# EAGLE board NavCom_Board_3 (EAGLE 7.2.0)
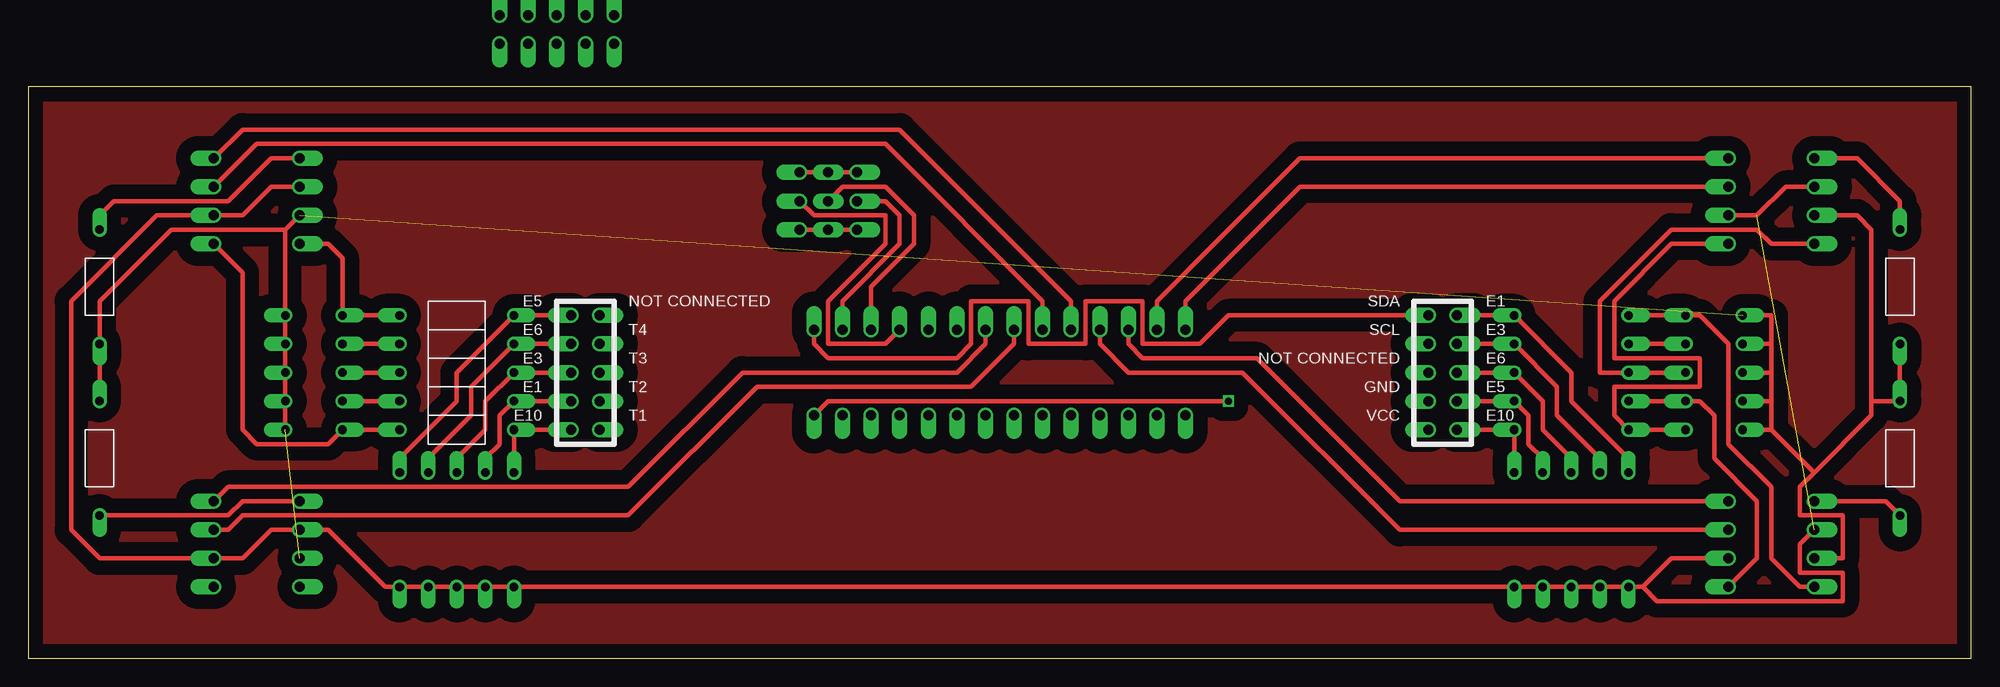
[diagram p0: board, top side]
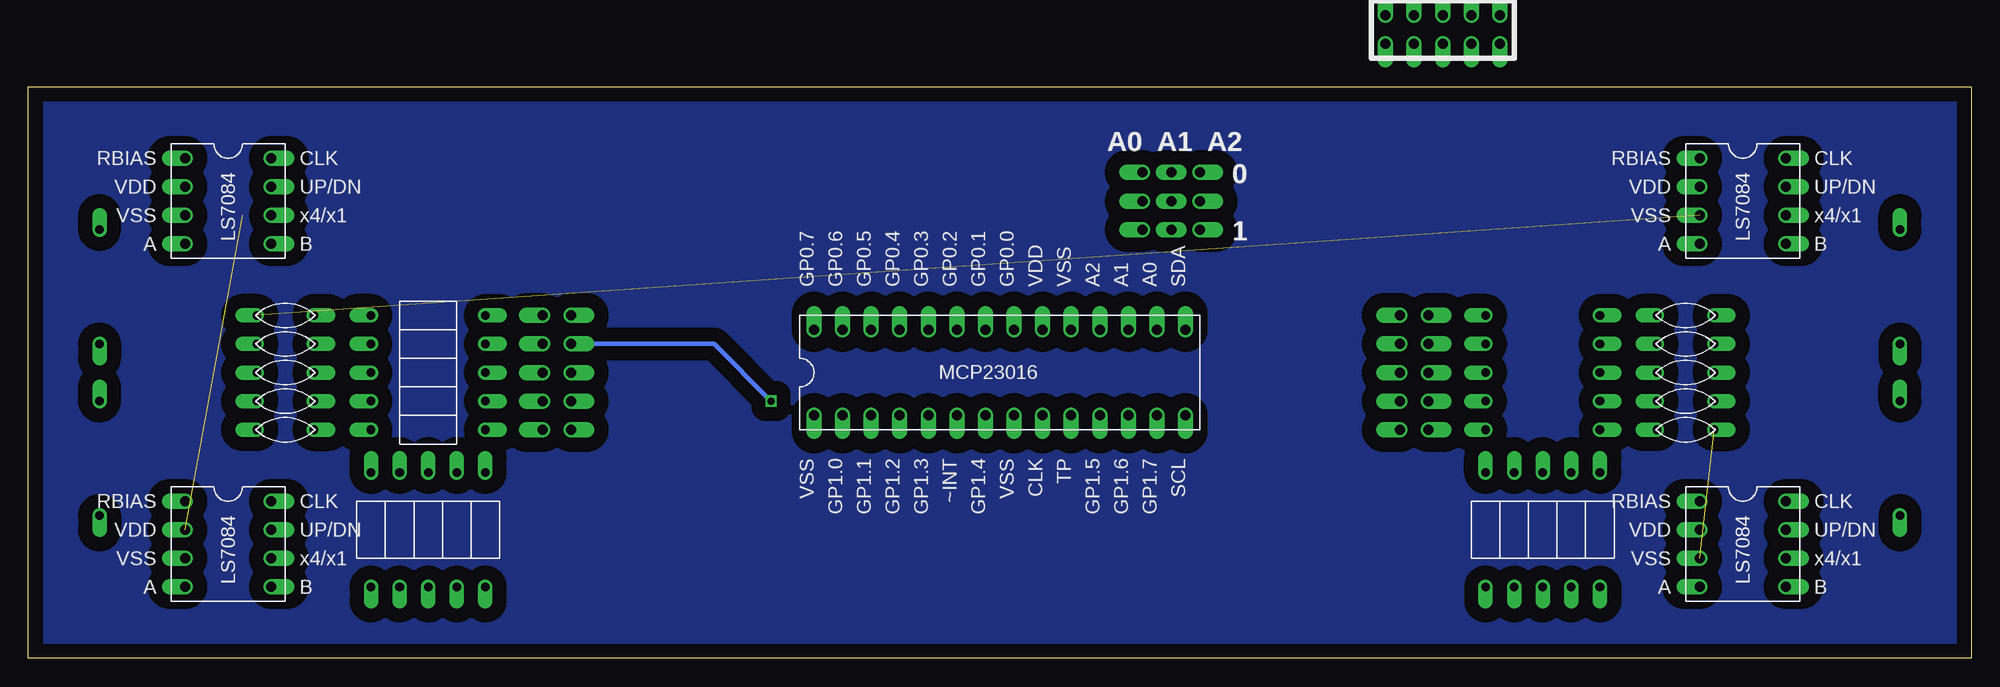
[diagram p1: board, bottom side, seen from below]

Size 172.72 x 50.8 mm. Coordinates in mm from the lower left corner, seen from the top.
Outline: 0,50.8 0,0 172.72,0 172.72,50.8 0,50.8
Copper layers (1*16): Top 0.035mm / dielectric 1.5mm / Bottom 0.035mm
Design rules "RadioStack_v2": minimum track width 0.2mm, minimum drill 0.4mm, track to track 0.2mm, track to pad 0.2mm, pad to pad 0.2mm, via to via 0.2mm, smd to smd 0.2mm, copper to edge 0.5mm, drill to drill 8mil, minimum pad ring 10mil, minimum via ring 8mil, stop-mask expansion 4mil, vias tented up to drill 0mil, thermal gap 10mil

## Footprints (pad centres in the part's own frame; a part is rotated, then mirrored left to right if it is on the bottom)
LISTA_2X5 = drill 0.889 pad 1.27 offset: 1 0,0; 2 0,-2.54; 3 0,-5.08; 4 0,-7.62; 5 0,-10.16; 6 2.54,-10.16; 7 2.54,-7.62; 8 2.54,-5.08; 9 2.54,-2.54; 10 2.54,0
MCP23016 = drill 0.889 pad 1.27 offset: A0 7.62,-30.48; A1 7.62,-27.94; A2 7.62,-25.4; CLK 0,-20.32; GP0.0 7.62,-17.78; GP0.1 7.62,-15.24; GP0.2 7.62,-12.7; GP0.3 7.62,-10.16; GP0.4 7.62,-7.62; GP0.5 7.62,-5.08; GP0.6 7.62,-2.54; GP0.7 7.62,0; GP1.0 0,-2.54; GP1.1 0,-5.08; GP1.2 0,-7.62; GP1.3 0,-10.16; GP1.4 0,-15.24; GP1.5 0,-25.4; GP1.6 0,-27.94; GP1.7 0,-30.48; SCL 0,-33.02; SDA 7.62,-33.02; TP 0,-22.86; VDD 7.62,-20.32; VSS1 0,0; VSS2 0,-17.78; VSS3 7.62,-22.86; ~INT 0,-12.7
LS7084 = drill 0.889 pad 1.27 offset: P$1 0,0; P$2 0,-2.54; P$3 0,-5.08; P$4 0,-7.62; P$5 7.62,-7.62; P$6 7.62,-5.08; P$7 7.62,-2.54; P$8 7.62,0
REZISTOR = drill 0.762 pad 1.27 offset: P$1 -5.08,0; P$2 5.08,0
KONDENZATOR = drill 0.762 pad 1.27 offset: P$1 -2.54,0; P$2 2.54,0
ADRESA_0..2 = drill 0.889 pad 1.27 offset: P$1 0,0; P$2 0,-2.54; P$3 0,-5.08; P$7 5.08,0; P$8 5.08,-2.54; P$9 5.08,-5.08 | drill 0.889 pad 1.27 long: P$4 2.54,-5.08; P$5 2.54,-2.54; P$6 2.54,0

## Placement (x,y rotation side)
CONNECTOR  LISTA_2X5  [LISTA_2X5]  48.26,30.48 0 top
CONNECTOR2  LISTA_2X5  [LISTA_2X5]  124.46,30.48 0 top
U$1  MCP23016  [MCP23016]  102.87,21.59 90 bottom
U$2  LISTA_2X5  [LISTA_2X5]  52.07,54.61 90 bottom  (outside the outline)
U$3  LS7084  [LS7084]  24.13,44.45 0 bottom
U$4  LS7084  [LS7084]  158.75,13.97 0 bottom
U$5  LS7084  [LS7084]  158.75,44.45 0 bottom
U$6  LS7084  [LS7084]  24.13,13.97 0 bottom
U$7  REZISTOR  [REZISTOR]  142.24,11.43 270 bottom
U$8  KONDENZATOR  [KONDENZATOR]  149.86,20.32 0 bottom
U$9  REZISTOR  [REZISTOR]  139.7,11.43 270 bottom
U$10  REZISTOR  [REZISTOR]  137.16,11.43 270 bottom
U$11  ADRESA_0..2  [ADRESA_0..2]  73.66,38.1 180 top
U$12  REZISTOR  [REZISTOR]  132.08,11.43 270 bottom
U$13  REZISTOR  [REZISTOR]  35.56,11.43 90 bottom
U$14  REZISTOR  [REZISTOR]  38.1,11.43 90 bottom
U$15  REZISTOR  [REZISTOR]  40.64,11.43 90 bottom
U$16  REZISTOR  [REZISTOR]  33.02,11.43 90 bottom
U$17  REZISTOR  [REZISTOR]  134.62,11.43 270 bottom
U$18  REZISTOR  [REZISTOR]  43.18,11.43 90 bottom
U$19  KONDENZATOR  [KONDENZATOR]  149.86,22.86 0 bottom
U$20  KONDENZATOR  [KONDENZATOR]  149.86,25.4 0 bottom
U$21  KONDENZATOR  [KONDENZATOR]  149.86,27.94 0 bottom
U$22  KONDENZATOR  [KONDENZATOR]  149.86,30.48 0 bottom
U$23  KONDENZATOR  [KONDENZATOR]  25.4,20.32 180 bottom
U$24  KONDENZATOR  [KONDENZATOR]  25.4,22.86 180 bottom
U$25  KONDENZATOR  [KONDENZATOR]  25.4,25.4 180 bottom
U$26  KONDENZATOR  [KONDENZATOR]  25.4,27.94 180 bottom
U$27  REZISTOR  [REZISTOR]  166.37,17.78 90 top
U$28  KONDENZATOR  [KONDENZATOR]  25.4,30.48 180 bottom
U$29  REZISTOR  [REZISTOR]  137.16,30.48 0 bottom
U$30  REZISTOR  [REZISTOR]  137.16,27.94 0 bottom
U$31  REZISTOR  [REZISTOR]  137.16,25.4 0 bottom
U$32  REZISTOR  [REZISTOR]  137.16,22.86 0 bottom
U$33  REZISTOR  [REZISTOR]  137.16,20.32 0 bottom
U$34  REZISTOR  [REZISTOR]  166.37,33.02 90 top
U$35  REZISTOR  [REZISTOR]  38.1,30.48 0 top
U$36  REZISTOR  [REZISTOR]  38.1,27.94 0 top
U$37  REZISTOR  [REZISTOR]  38.1,25.4 0 top
U$38  REZISTOR  [REZISTOR]  38.1,22.86 0 top
U$39  REZISTOR  [REZISTOR]  38.1,20.32 0 top
U$40  REZISTOR  [REZISTOR]  6.35,33.02 90 top
U$41  REZISTOR  [REZISTOR]  6.35,17.78 270 top

## Library data of the parts
CONNECTOR CONNECTOR2 U$1-U$41 = RadioStack_v2

## Nets
N$1: CONNECTOR2.10 U$7.P$1 U$29.P$2
N$2: CONNECTOR2.9 U$9.P$1 U$30.P$2
N$3: CONNECTOR2.8 U$10.P$1 U$31.P$2
N$4: CONNECTOR2.6 U$12.P$1 U$33.P$2
N$5: U$5.P$5 U$8.P$2 U$33.P$1
N$6: CONNECTOR2.7 U$17.P$1 U$32.P$2
N$7: U$11.P$3 U$11.P$4 U$11.P$9
N$8: U$11.P$1 U$11.P$6 U$11.P$7
N$9: CONNECTOR.1 U$16.P$2 U$35.P$2
N$10: CONNECTOR.2 U$13.P$2 U$36.P$2
N$11: CONNECTOR.3 U$14.P$2 U$37.P$2
N$12: CONNECTOR.4 U$15.P$2 U$38.P$2
N$13: CONNECTOR.5 U$18.P$2 U$39.P$2
N$14: U$3.P$5 U$23.P$2 U$39.P$1
N$15: U$4.P$5 U$19.P$2 U$32.P$1
N$16: U$3.P$3 U$4.P$3 U$5.P$3 U$6.P$3 U$8.P$1 U$19.P$1 U$20.P$1 U$21.P$1 U$22.P$1 U$23.P$1 U$24.P$1 U$25.P$1 U$26.P$1 U$27.P$2 U$28.P$1 U$34.P$1 U$40.P$1 U$41.P$1
N$17: U$5.P$4 U$20.P$2 U$31.P$1
N$18: U$21.P$2 U$30.P$1
N$19: U$4.P$4 U$22.P$2 U$29.P$1
N$20: U$24.P$2 U$38.P$1
N$21: U$25.P$2 U$37.P$1
N$22: U$4.P$1 U$27.P$1
N$23: U$26.P$2 U$36.P$1
N$24: U$1.GP0.4 U$4.P$7
N$26: U$1.GP0.5 U$4.P$8
N$28: U$1.A2 U$11.P$8
N$29: U$3.P$4 U$28.P$2 U$35.P$1
N$30: U$5.P$1 U$34.P$2
N$31: U$3.P$1 U$40.P$2
N$32: U$1.GP0.7 U$5.P$7
N$33: U$1.GP0.6 U$5.P$8
N$34: U$1.GP0.3 U$3.P$8
N$35: U$1.GP0.2 U$3.P$7
N$36: U$1.GP0.0 U$6.P$8
N$37: U$6.P$1 U$41.P$2
N$38: U$1.A1 U$11.P$5
N$39: U$1.GP0.1 U$6.P$7
N$40: U$1.A0 U$11.P$2
N$42: CONNECTOR2.1 U$1.SDA
N$43: CONNECTOR2.2 U$1.SCL
N$44: U$3.P$2 U$3.P$6 U$4.P$2 U$4.P$6 U$5.P$2 U$5.P$6 U$6.P$2 U$6.P$6 U$7.P$2 U$9.P$2 U$10.P$2 U$12.P$2 U$13.P$1 U$14.P$1 U$15.P$1 U$16.P$1 U$17.P$2 U$18.P$1

## Tracks (layer width: path | path; a pad name or v marks a point on that pad's centre or on a via)
N$1
  Top 0.406: U$7.P$1 142.24,17.78 137.16,22.86 137.16,25.4 U$29.P$2 CONNECTOR2.10
N$2
  Top 0.406: U$9.P$1 139.7,17.78 135.89,21.59 135.89,24.13 U$30.P$2 CONNECTOR2.9
N$3
  Top 0.406: U$10.P$1 137.16,17.78 134.62,20.32 134.62,22.86 U$31.P$2 CONNECTOR2.8
N$4
  Top 0.406: CONNECTOR2.6 U$33.P$2 U$12.P$1
N$5
  Top 0.406: U$5.P$5 146.05,36.83 140.97,31.75 140.97,26.67 148.59,26.67 148.59,24.13 140.97,24.13 140.97,21.59 U$33.P$1 U$8.P$2
N$6
  Top 0.406: CONNECTOR2.7 U$32.P$2 133.35,21.59 133.35,19.05 134.62,17.78 U$17.P$1
N$7
  Top 0.406: U$11.P$9 U$11.P$4 U$11.P$3
N$8
  Top 0.406: U$11.P$7 U$11.P$6 U$11.P$1
N$9
  Top 0.406: CONNECTOR.1 U$35.P$2 38.1,25.4 38.1,22.86 33.02,17.78 U$16.P$2
N$10
  Top 0.406: CONNECTOR.2 U$36.P$2 39.37,24.13 39.37,21.59 35.56,17.78 U$13.P$2
N$11
  Top 0.406: U$14.P$2 38.1,17.78 40.64,20.32 40.64,22.86 U$37.P$2 CONNECTOR.3
N$12
  Top 0.406: U$15.P$2 40.64,17.78 41.91,19.05 41.91,21.59 U$38.P$2 CONNECTOR.4
N$13
  Top 0.406: U$18.P$2 U$39.P$2 CONNECTOR.5
N$14
  Top 0.406: U$39.P$1 U$23.P$2 26.67,19.05 20.32,19.05 19.05,20.32 19.05,34.29 U$3.P$5
N$15
  Top 0.406: U$32.P$1 U$19.P$2 148.59,22.86 149.86,21.59 149.86,17.78 153.67,13.97 153.67,8.89 U$4.P$5
N$16  (2 unrouted)
  Top 0.406: U$22.P$1 154.94,30.48 154.94,27.94 | 154.94,27.94 154.94,25.4 | 154.94,25.4 154.94,22.86 | 154.94,22.86 154.94,20.32 | 154.94,20.32 U$8.P$1 | U$19.P$1 154.94,22.86 | U$20.P$1 154.94,25.4 | U$21.P$1 154.94,27.94 | U$5.P$3 162.56,39.37 163.83,38.1 163.83,22.86 | 163.83,22.86 163.83,21.59 158.75,16.51 | 158.75,16.51 157.48,15.24 157.48,12.7 161.29,12.7 161.29,8.89 U$4.P$3 | U$34.P$1 U$27.P$2 163.83,22.86 | U$23.P$1 U$24.P$1 U$25.P$1 U$26.P$1 U$28.P$1 22.86,38.1 | 22.86,38.1 U$3.P$3 | U$41.P$1 U$40.P$1 6.35,31.75 12.7,38.1 22.86,38.1 | 154.94,20.32 158.75,16.51
N$17
  Top 0.406: U$20.P$2 U$31.P$1 139.7,25.4 139.7,31.75 146.05,38.1 153.67,38.1 154.94,36.83 U$5.P$4
N$18
  Top 0.406: U$30.P$1 U$21.P$2
N$19
  Top 0.406: U$29.P$1 U$22.P$2 148.59,30.48 151.13,27.94 151.13,19.05 154.94,15.24 154.94,8.89 157.48,6.35 U$4.P$4
N$20
  Top 0.406: U$24.P$2 U$38.P$1
N$21
  Top 0.406: U$25.P$2 U$37.P$1
N$22
  Top 0.406: U$4.P$1 165.1,13.97 U$27.P$1
N$23
  Top 0.406: U$26.P$2 U$36.P$1
N$24
  Top 0.406: U$4.P$7 121.92,11.43 107.95,25.4 97.79,25.4 95.25,27.94 U$1.GP0.4
N$25
  pour Top (isolate 1.27): 1.27,49.53 171.45,49.53 171.45,1.27 1.27,1.27
N$26
  Top 0.406: U$4.P$8 121.92,13.97 109.22,26.67 99.06,26.67 97.79,27.94 U$1.GP0.5
N$27
  pour Bottom (isolate 1.27): 1.27,49.53 171.45,49.53 171.45,1.27 1.27,1.27
N$28
  Top 0.406: U$11.P$8 69.85,39.37 76.2,39.37 76.2,36.83 71.12,31.75 71.12,27.94 76.2,27.94 U$1.A2
N$29
  Top 0.406: U$35.P$1 U$28.P$2 27.94,35.56 26.67,36.83 U$3.P$4
N$30
  Top 0.406: U$34.P$2 166.37,40.64 162.56,44.45 U$5.P$1
N$31
  Top 0.406: U$3.P$1 21.59,44.45 17.78,40.64 7.62,40.64 6.35,39.37 U$40.P$2
N$32
  Top 0.406: U$5.P$7 113.03,41.91 102.87,31.75 U$1.GP0.7
N$33
  Top 0.406: U$5.P$8 113.03,44.45 100.33,31.75 U$1.GP0.6
N$34
  Top 0.406: U$3.P$8 19.05,46.99 77.47,46.99 92.71,31.75 U$1.GP0.3
N$35
  Top 0.406: U$3.P$7 20.32,45.72 76.2,45.72 90.17,31.75 U$1.GP0.2
N$36
  Top 0.406: U$6.P$8 17.78,15.24 53.34,15.24 63.5,25.4 82.55,25.4 85.09,27.94 U$1.GP0.0
N$37
  Top 0.406: U$6.P$1 19.05,13.97 17.78,12.7 U$41.P$2
N$38
  Top 0.406: U$11.P$5 72.39,41.91 76.2,41.91 78.74,39.37 78.74,36.83 74.93,33.02 U$1.A1
N$39
  Top 0.406: U$6.P$7 17.78,11.43 19.05,12.7 53.34,12.7 64.77,24.13 83.82,24.13 87.63,27.94 U$1.GP0.1
N$40
  Top 0.406: U$11.P$2 76.2,40.64 77.47,39.37 77.47,36.83 72.39,31.75 U$1.A0
N$42
  Top 0.406: CONNECTOR2.1 106.68,30.48 104.14,27.94 99.06,27.94 99.06,31.75 93.98,31.75 93.98,27.94 88.9,27.94 88.9,31.75 83.82,31.75 83.82,27.94 82.55,26.67 71.12,26.67 69.85,27.94 U$1.SDA
N$43  (via drill 0.6)
  Top 0.406: v106.68,22.86 71.12,22.86 U$1.SCL
  Bottom 0.406: CONNECTOR2.2 111.76,27.94 v106.68,22.86
N$44  (1 unrouted)
  Top 0.406: 143.51,6.35 U$7.P$2 U$9.P$2 U$10.P$2 U$17.P$2 U$12.P$2 U$18.P$1 U$15.P$1 U$14.P$1 U$13.P$1 U$16.P$1 31.75,6.35 26.67,11.43 U$6.P$2 21.59,11.43 19.05,8.89 U$6.P$6 6.35,8.89 3.81,11.43 3.81,31.75 11.43,39.37 U$3.P$6 19.05,39.37 21.59,41.91 U$3.P$2 | 143.51,6.35 146.05,8.89 U$4.P$6 | U$4.P$2 157.48,10.16 157.48,7.62 161.29,7.62 161.29,5.08 144.78,5.08 143.51,6.35 | U$5.P$2 156.21,41.91 153.67,39.37 U$5.P$6

## Text on the board
tPlace: E5 | NOT CONNECTED | SDA | E1 | E6 | T4 | SCL | E3 | E3 | T3 | NOT CONNECTED | E6 | E1 | T2 | GND | E5 | E10 | T1 | VCC | E10
bPlace: NavCom Radio v2.1 - Board 3 | A2 | A1 | A0 | 0 | 1